# Altium PCB F407Z.PcbDoc (part 1 of 3)
Units mil, origin at the board's own origin, x right, y up, seen from the top; angles counter-clockwise.
Board outline 4724.41 x 3937.01 mil, 2 copper layers (Top Layer, Bottom Layer), stack 61.855 mil thick; 103 components, 137 nets, 547 pads, 2347 vias.
Unrouted connection lines stored in the file: 2.
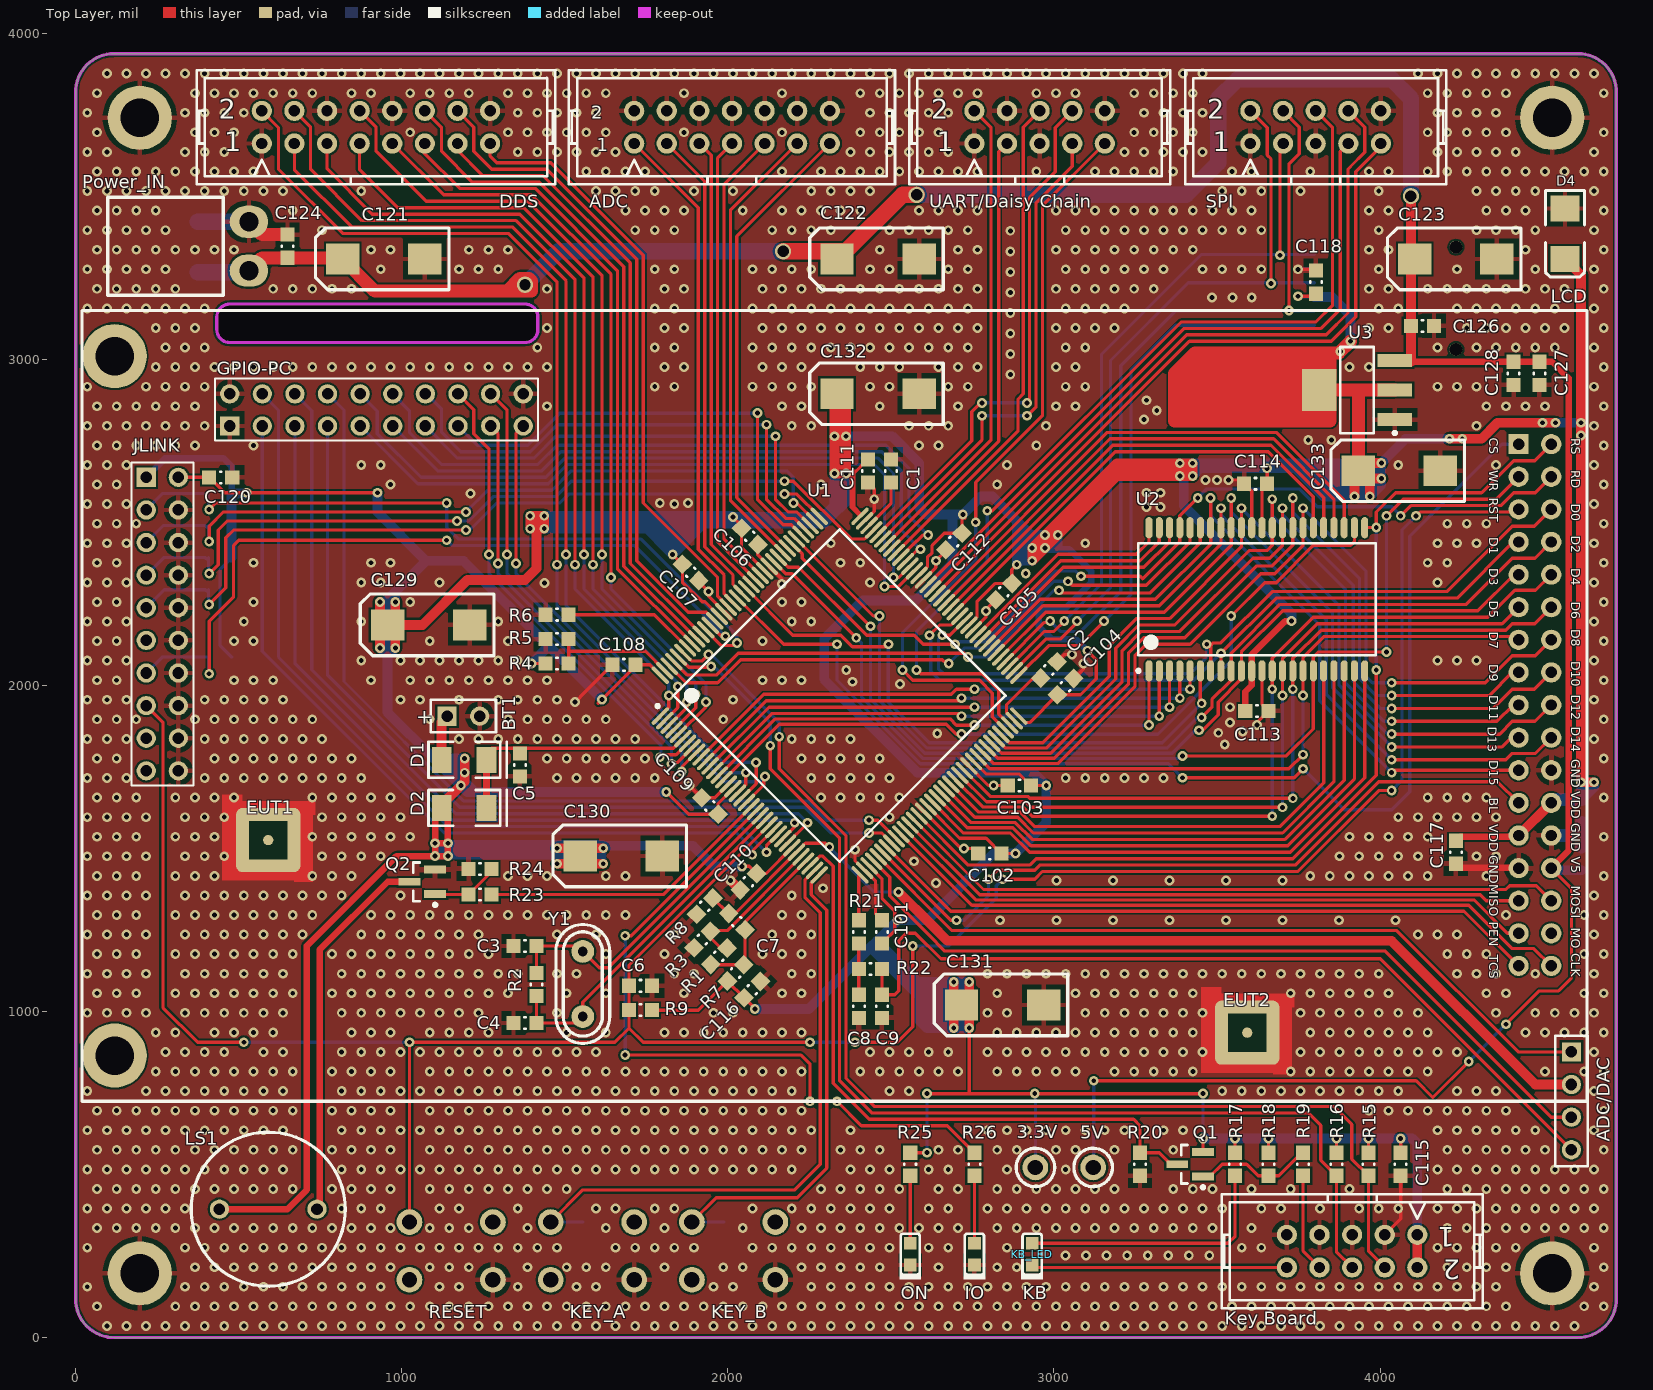
[diagram p0: Top Layer view]
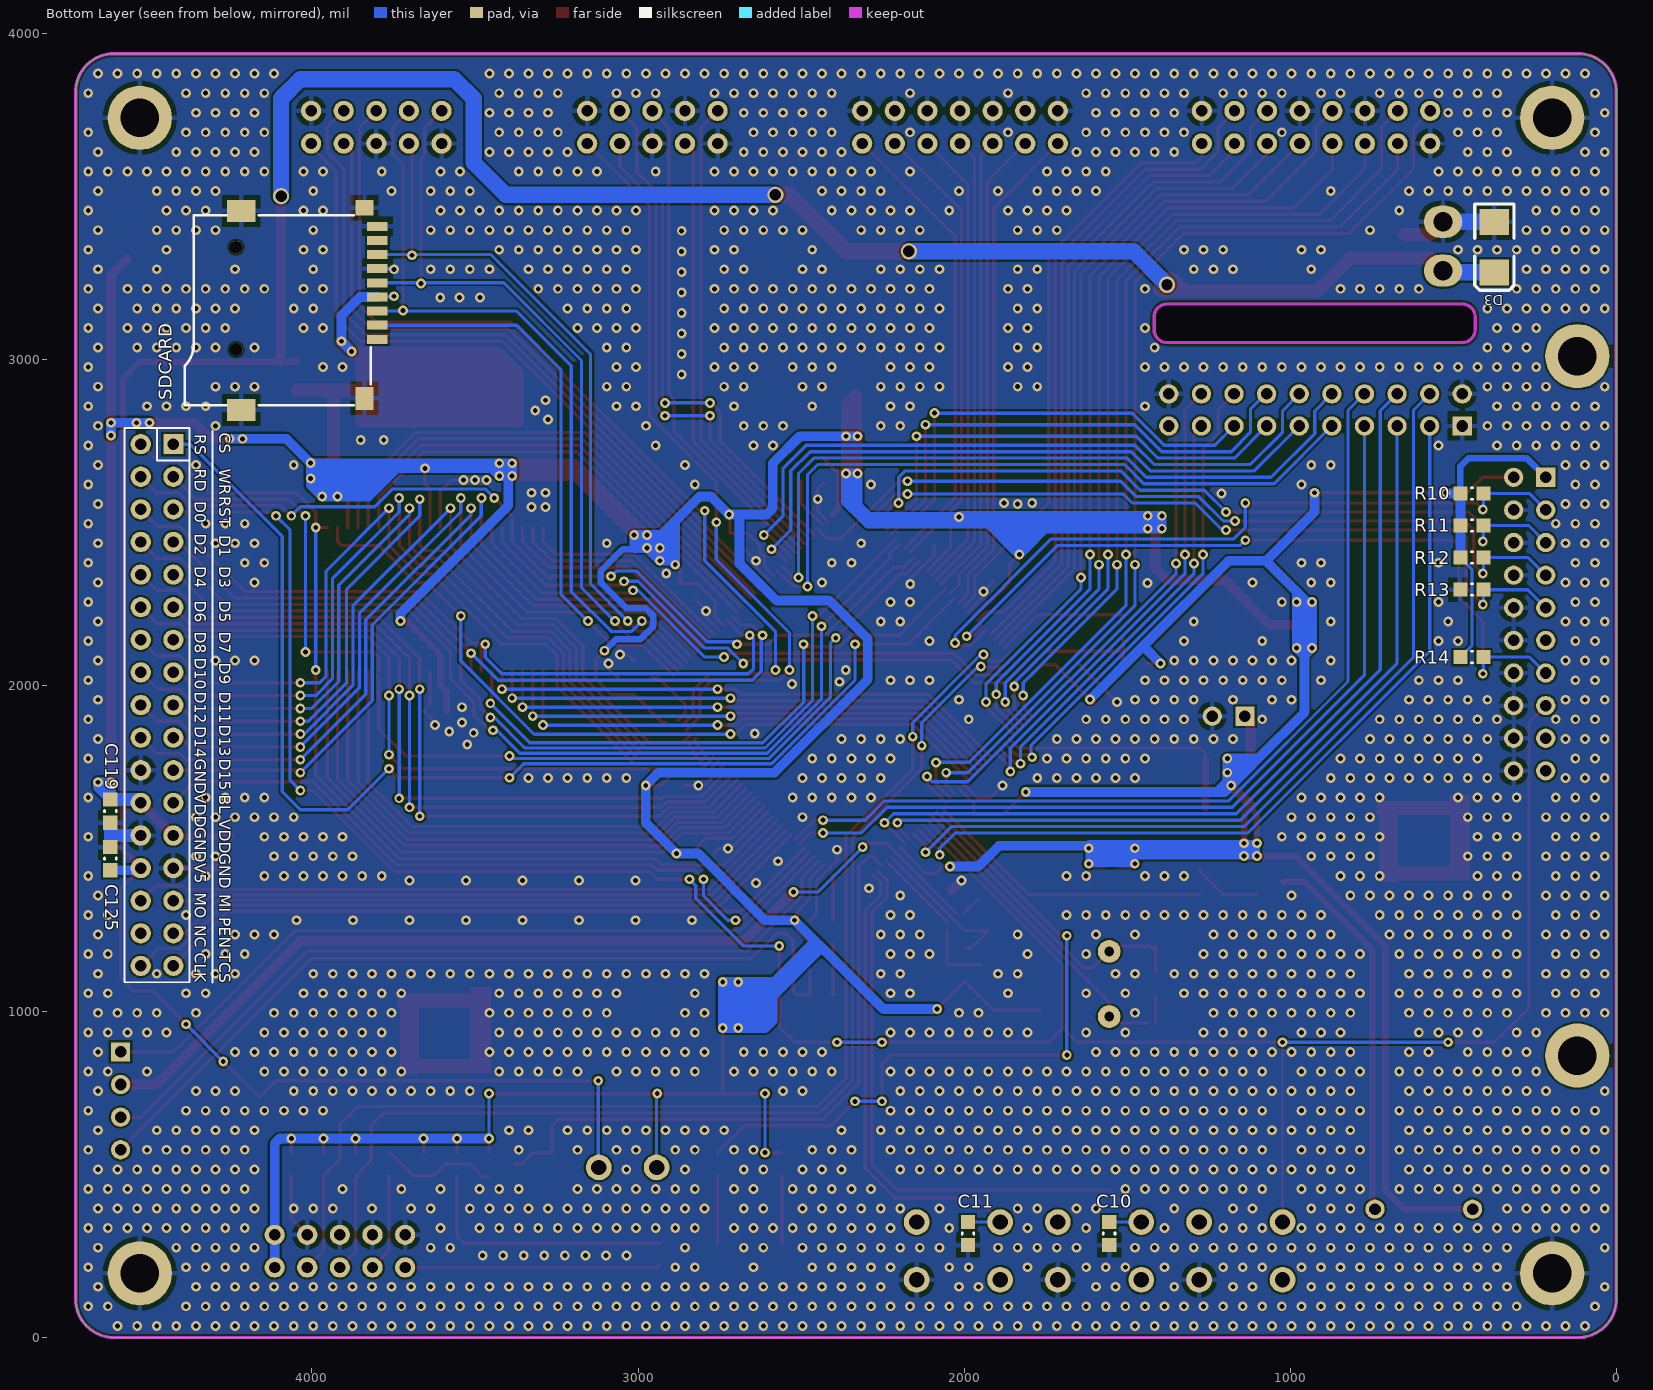
[diagram p1: Bottom Layer view, seen from below]

## Layer stack, top to bottom
Top Solder: solder mask 0.4, Solder Resist, Dk 3.5
Top Layer: signal copper 1.4
Dielectric 1: dielectric 59.0551, FR-4, Dk 4.8
Bottom Layer: signal copper 1.4
Bottom Solder: solder mask 0.4, Solder Resist, Dk 3.5

## Board outline
118.11,0 cw(c118.11,118.11) 0,118.11 0,3818.9 cw(c118.11,3818.9) 118.11,3937.01 4606.3,3937.01 cw(c4606.3,3818.9) 4724.41,3818.9 4724.41,118.11 cw(c4606.3,118.11) 4606.3,0
cut-out: 1377.95,3051.18 ccw(c1377.95,3090.55) 1417.32,3090.55 1417.32,3129.92 ccw(c1377.95,3129.92) 1377.95,3169.29 472.44,3169.29 ccw(c472.44,3129.92) 433.07,3129.92 433.07,3090.55 ccw(c472.44,3090.55) 472.44,3051.18

## Design rules (kind name [scope] priority, off if disabled: settings)
Clearance [All] p1: gap=6
HoleSize [All] p1: absolutevalues=TRUE maxlimit=99999 minlimit=12 maxpercent=80.000 minpercent=20.000
MinimumSolderMaskSliver [All] p1: minsoldermaskwidth=1
PolygonConnect PolygonConnect_1 [IsVia] p1: connectstyle=Direct reliefconductorwidth=10 reliefentries=4 polygonreliefangle="90 Angle" airgapwidth=10
PolygonConnect [All] p2: connectstyle=Relief reliefconductorwidth=15 reliefentries=4 polygonreliefangle="90 Angle" airgapwidth=15
RoutingVias [All] p1: holewidth=15 width=30 viastyle="Through Hole" minholewidth=12 minwidth=25 maxholewidth=1000 maxwidth=5000
SilkToSilkClearance [All] p1: silktosilkclearance=1
SilkToSolderMaskClearance [IsPad] p1: minsilkscreentomaskgap=1 clearancetoexposedcopper=TRUE
SolderMaskExpansion [All] p1: expansion=4
Width [All] p1: maxlimit=10000 minlimit=6 preferedwidth=10
26 further rules are at their usual default settings.

## Classes and differential pairs
component class Ports: 3.3V 5V ADC ADC1 ADC/DAC DDS DDS1 EUT1 EUT2 GPIO-PC JLINK JLINK1 KB KB_LED KB_LED1 "Key Board" "Key Board1" Q1 R10 R11 R12 R13 R14 R15 R16 R17 R18 R19 R20 SDCARD SDCARD1 SPI SPI1 "UART/Daisy Chain" "UART/Daisy Chain1"
component class STM32: BT1 C1 C2 C3 C4 C5 C6 C7 C8 C9 C10 C11 D1 D2 D3 D4 IO KEY_A KEY_B LCD LS1 ON Power_IN Q2 R1 R2 R3 R4 R5 R6 R7 R8 R9 R21 R22 R23 R24 R25 R26 RESET U1 U2 U3 Y1
component class "Decoupling CAP": C12 C13 C14 C15 C16 C17 C18 C19 C20 C21 C22 C23 C24 C25 C26 C27 C28 C29 C101 C102 C103 C104 C105 C106 C107 C108 C109 C110 C111 C112 C113 C114 C115 C116 C117 C118 C119 C120 C121 C122 C123 C124 C125 C126 C127 C128 C129 C130 C131 C132 C133

## Components (designator, comment, footprint, x,y, rotation, side; value= is the part's Value field where it differs from the comment)
3.3V "TestPoint" TestHole 2942.91,521.65 r90 top
5V "TestPoint" TestHole 3120.08,521.65 r0 top
ADC "Header 7X2" HEADER7X2 1712.6,3661.42 r0 top
ADC/DAC "Header 4" HDR1X4 4586.61,875.98 r270 top
BT1 "3V" BAT-2 1188.98,1905.51 r0 top
C1 "2.2uF" CAPC0603(1608)55_M 2500,2657.48 r270 top
C2 "2.2uF" CAPC0603(1608)55_M 2984.25,2047.24 r225 top
C3 "33pF" CAPC0603(1608)55_M 1377.95,1200.79 r180 top
C4 "33pF" CAPC0603(1608)55_M 1377.95,964.57 r180 top
C5 "100nF" CAPC0603(1608)55_M 1362.2,1755.91 r270 top
C6 "100nF" CAPC0603(1608)55_M 1732.28,1078.74 r0 top
C7 "100nF" CAPC0603(1608)55_M 2027.56,1275.59 r315 top
C8 "10nF" CAPC0603(1608)55_M 2401.57,1015.75 r90 top
C9 "10nF" CAPC0603(1608)55_M 2472.44,1015.75 r90 top
C10 "100nF" CAPC0603(1608)55_M 1555.12,318.9 r270 bottom
C11 "100nF" CAPC0603(1608)55_M 1988.19,318.9 r270 bottom
C101 "100nF" CAPC0603(1608)55_M 2472.44,1244.09 r270 top
C102 "100nF" CAPC0603(1608)55_M 2803.15,1484.25 r0 top
C103 "100nF" CAPC0603(1608)55_M 2893.7,1692.91 r0 top
C104 "100nF" CAPC0603(1608)55_M 3035.43,1996.06 r225 top
C105 "100nF" CAPC0603(1608)55_M 2846.46,2287.4 r45 top
C106 "100nF" CAPC0603(1608)55_M 2066.93,2456.69 r135 top
C107 "100nF" CAPC0603(1608)55_M 1885.83,2346.46 r135 top
C108 "100nF" CAPC0603(1608)55_M 1681.1,2062.99 r0 top
C109 "100nF" CAPC0603(1608)55_M 1944.88,1629.92 r315 top
C110 "100nF" CAPC0603(1608)55_M 2062.99,1397.64 r45 top
C111 "100nF" CAPC0603(1608)55_M 2429.13,2657.48 r90 top
C112 "100nF" CAPC0603(1608)55_M 2692.91,2440.94 r45 top
C113 "100nF" CAPC0603(1608)55_M 3622.05,1921.26 r180 top
C114 "100nF" CAPC0603(1608)55_M 3618.11,2618.11 r0 top
C115 "100nF" CAPC0603(1608)55_M 4062.99,531.5 r90 top
C116 "100nF" CAPC0603(1608)55_M 2074.8,1066.93 r225 top
C117 "100nF" CAPC0603(1608)55_M 4232.28,1488.19 r90 top
C118 "100nF" CAPC0603(1608)55_M 3803.15,3236.22 r270 top
C119 "100nF" CAPC0603(1608)55_M 4618.11,1614.17 r90 bottom
C120 "100nF" CAPC0603(1608)55_M 444.88,2637.8 r180 top
C121 "470uF" CAPC7343 944.88,3307.09 r0 top
C122 "470uF" CAPC7343 2460.63,3307.09 r0 top
C123 "470uF" CAPC7343 4232.28,3307.09 r0 top
C124 "100nF" CAPC0603(1608)55_M 649.61,3346.46 r270 top
C125 "100nF" CAPC0603(1608)55_M 4618.11,1468.5 r270 bottom
C126 "100nF" CAPC0603(1608)55_M 4129.92,3102.36 r180 top
C127 "100nF" CAPC0603(1608)55_M 4488.19,2956.69 r90 top
C128 "100nF" CAPC0603(1608)55_M 4409.45,2956.69 r90 top
C129 "470uF" CAPC7343 1082.68,2185.04 r0 top
C130 "470uF" CAPC7343 1673.23,1476.38 r0 top
C131 "470uF" CAPC7343 2842.52,1019.68 r0 top
C132 "470uF" CAPC7343 2460.63,2893.7 r0 top
C133 "470uF" CAPC7343 4059.06,2657.48 r0 top
D1 "1N4148" LL34 1259.84,1771.65 r270 top
D2 "1N4148" LL34 1259.84,1624.02 r270 top
D3 "P6KE6.8A" DO-214AC 374.02,3266.26 r90 bottom
D4 "M7" DO-214AC 4566.93,3307.09 r90 top
DDS "Header 8X2" HEADER8X2 570.87,3661.42 r0 top
EUT1 "EUT" EUT 590.55,1525.59 r0 top
EUT2 "EUT" EUT 3592.52,935.04 r0 top
GPIO-PC "Header 10X2" "HEADER 10X2" 472.44,2795.28 r90 top
IO "LED-BLUE" 0603LED_BLUE_V 2755.91,255.91 r90 top
JLINK "Header 10X2" "HEADER 10X2" 216.54,2637.8 r0 top
KB_LED "LED-BLUE" 0603LED_BLUE_V 2933.07,255.91 r90 top
"Key Board" "JTAG" HEADER5X2 4114.17,314.96 r180 top
KEY_A "Button" Button665 1712.6,354.33 r180 top
KEY_B "Button" Button665 2145.67,354.33 r180 top
LCD "TFT_LCD4.7" DB2*17-3.5 19.69,3149.61 r270 top locked
LS1 "Speaker" Buzzer 590.55,393.7 r0 top
ON "LED-BLUE" 0603LED_BLUE_V 2559.06,255.91 r90 top
Power_IN "Header 2" VH3.96-2-AW 531.5,3346.46 r90 top
Q1 "MMBT3906" SOT23_M 3417.32,531.5 r180 top
Q2 "MMBT3904" SOT23_M 1062.99,1397.64 r180 top
R1 "0R" RESC0603(1608)_M 1972.44,1169.29 r225 top
R2 "1M" RESC0603(1608)_M 1413.39,1082.68 r90 top
R3 "Open" RESC0603(1608)_M 1921.26,1220.47 r45 top
R4 "20K" RESC0603(1608)_M 1476.38,2066.93 r0 top
R5 "20K" RESC0603(1608)_M 1476.38,2141.73 r0 top
R6 "100K" RESC0603(1608)_M 1476.38,2216.54 r180 top
R7 "49R9" RESC0603(1608)_M 2023.62,1118.11 r225 top
R8 "0R" RESC0603(1608)_M 1929.13,1322.83 r225 top
R9 "10K" RESC0603(1608)_M 1732.28,1003.94 r0 top
R10 "1K" RESC0603(1608)_M 442.91,2588.58 r180 bottom
R11 "1K" RESC0603(1608)_M 442.91,2490.16 r180 bottom
R12 "1K" RESC0603(1608)_M 442.91,2391.73 r180 bottom
R13 "1K" RESC0603(1608)_M 442.91,2293.31 r180 bottom
R14 "1K" RESC0603(1608)_M 442.91,2086.61 r180 bottom
R15 "10K" RESC0603(1608)_M 3964.57,531.5 r90 top
R16 "10K" RESC0603(1608)_M 3866.14,531.5 r90 top
R17 "1K" RESC0603(1608)_M 3555.12,531.5 r90 top
R18 "10K" RESC0603(1608)_M 3657.48,531.5 r90 top
R19 "1K" RESC0603(1608)_M 3763.78,531.5 r270 top
R20 "10K" RESC0603(1608)_M 3263.78,531.5 r90 top
R21 "1K" RESC0603(1608)_M 2401.57,1244.09 r270 top
R22 "1K" RESC0603(1608)_M 2437.01,1129.92 r0 top
R23 "1K" RESC0603(1608)_M 1240.16,1358.27 r180 top
R24 "10K" RESC0603(1608)_M 1240.16,1437.01 r0 top
R25 "1K" RESC0603(1608)_M 2559.06,531.5 r90 top
R26 "1K" RESC0603(1608)_M 2755.91,531.5 r90 top
RESET "Button" Button665 1279.53,354.33 r180 top
SDCARD "Trans Flash Card Socket" "TF Card" 4232.28,3149.61 r0 bottom
SPI "Header 5X2" HEADER5X2 3602.36,3661.42 r0 top
U1 "STM32F407ZxT6" LQFP144 2342.52,1968.5 r45 top locked
U2 "IS62WV51216BLL" TSOP-2-44 3622.05,2263.78 r90 top locked
U3 "AMS1117" SOT-223_M 3929.13,2905.51 r180 top
"UART/Daisy Chain" "Header 5X2" HEADER5X2 2755.91,3661.42 r0 top
Y1 "8MHz" HC-49S 1555.12,984.25 r90 top

## Footprints (in the part's own frame and the unit in brackets; to place one, negate y for a bottom-side part, rotate by r counter-clockwise, add the part's x,y. Pads: shape width x height; smd on the part's side, far side on the other; paste and mask are expansions set on the pad)
0603LED_BLUE_V [mm] "SMT LED, 2-Leads, Body 1.6x0.8mm (0603-Size)"
  rect 1x1 smd paste+0 mask+0: 1(0.85,0) 2(-0.85,0)
  silkscreen extent -1.97,-0.85 1.6,0.85, body extent -0.92,-0.53 1.09,0.53, height 1.1
BAT-2 [mm] "Battery; 2 Leads"
  rect 1.5x1.5 hole 0.9: 1(-1.27,0)
  round 1.5 hole 0.9: 2(1.27,0)
  silkscreen extent -2.54,-1.27 2.54,1.27
Button665 [mm]
  round 2 hole 1.2: 0(0,0) 1(6.5,0) 2(0,4.5) 3(6.5,4.5)
  body extent -0.25,-0.75 6.75,5.25, height 5
Buzzer [mm]
  round 1.5 hole 0.9: 1(-3.8,0) 2(3.8,0)
  silkscreen extent -6,-6 6,6, body extent -6.01,-6.01 6.01,6.01, height 9.6
CAPC0603(1608)55_M [mm] "Chip Capacitor, Body 1.6x0.8mm, Height 0.55mm, IPC Low Density"
  rect 1.1x1.1 smd: 1(-0.9,0) 2(0.9,0)
  silkscreen extent -0.05,-0.45 0.05,0.45, body extent -0.87,-0.47 0.88,0.48, height 0.55
CAPC7343 [mm] "SMT Capacitor, 2 Leads, Body 7.3x4.3mm"
  rect 2.6x2.4 smd: 1(-3.202,0.007) 2(3.198,0.007)
  silkscreen extent -5.33,-2.39 5.08,2.41, body extent -3.49,-2.03 3.51,2.04, height 2.91
DB2*17-3.5 [mil]
  round 196.85 hole 118.11: 0(140.16,100) 0(2284.84,100)
  rect 62x62 hole 35: 1(410,4405)
  round 62 hole 35: 2(410,4505) 3(510,4405) 4(510,4505) 5(610,4405) 6(610,4505) 7(710,4405) 8(710,4505) 9(810,4405) 10(810,4505) 11(910,4405) 12(910,4505) 13(1010,4405) 14(1010,4505) 15(1110,4405) 16(1110,4505) 17(1210,4405) 18(1210,4505) 19(1310,4405) 20(1310,4505) 21(1410,4405) 22(1410,4505) 23(1510,4405) 24(1510,4505) 25(1610,4405) 26(1610,4505) 27(1710,4405) 28(1710,4505) 29(1810,4405) 30(1810,4505) 31(1910,4405) 32(1910,4505) 33(2010,4405) 34(2010,4505)
  silkscreen extent 0,0 2425,4615, body extent -5,-5 2430,4620, height 472
DO-214AC [mil]
  rect 80x90 smd: 1(155,0) 2(0,0)
  silkscreen extent -55,-60 210,60
EUT [mm]
  round 0.8 smd: 1(0,0)
  oval 1x5 smd: 2(-2,0) 2(2,0)
  oval 5x1 smd: 2(0,-2) 2(0,2)
HC-49S [mil]
  round 70 hole 30: 1(0,0) 2(200,0)
  silkscreen extent -82,-82 282,82, body extent -83,-83 283,83, height 118
HDR1X4 [mm] "Connector; Header; 4 Position"
  rect 1.5x1.5 hole 0.9: 1(0,0)
  round 1.5 hole 0.9: 2(2.54,0) 3(5.08,0) 4(7.62,0)
  silkscreen extent -1.27,-1.27 8.89,1.27
HEADER5X2 [mil]
  round 62 hole 35: 1(0,0) 2(0,100) 3(100,0) 4(100,100) 5(200,0) 6(200,100) 7(300,0) 8(300,100) 9(400,0) 10(400,100)
  silkscreen extent -200,-125 600,225
HEADER7X2 [mil]
  round 62 hole 35: 1(0,0) 2(0,100) 3(100,0) 4(100,100) 5(200,0) 6(200,100) 7(300,0) 8(300,100) 9(400,0) 10(400,100) 11(500,0) 12(500,100) 13(600,0) 14(600,100)
  silkscreen extent -200,-125 800,225
HEADER8X2 [mil]
  round 62 hole 35: 1(0,0) 2(0,100) 3(100,0) 4(100,100) 5(200,0) 6(200,100) 7(300,0) 8(300,100) 9(400,0) 10(400,100) 11(500,0) 12(500,100) 13(600,0) 14(600,100) 15(700,0) 16(700,100)
  silkscreen extent -200,-125 902,225
"HEADER 10X2" [mm]
  rect 1.5x1.5 hole 0.9: 1(0,0)
  round 1.5 hole 0.9: 2(2.5,0) 3(0,-2.54) 4(2.5,-2.54) 5(0,-5.08) 6(2.5,-5.08) 7(0,-7.62) 8(2.5,-7.62) 9(0,-10.16) 10(2.5,-10.16) 11(0,-12.7) 12(2.5,-12.7) 13(0,-15.24) 14(2.5,-15.24) 15(0,-17.78) 16(2.5,-17.78) 17(0,-20.32) 18(2.5,-20.32) 19(0,-22.86) 20(2.5,-22.86)
  silkscreen extent -1.14,-24 3.68,1.14, body extent -1.14,-24 3.68,1.14, height 8
LL34 [mil]
  rect 80x60 smd: 1(0,-137.8) 2(0,0)
  silkscreen extent -55,-178 55,62
LQFP144 [mm] "Thin QFP, 144-Leads, Body 20x20mm, Pitch 0.5mm, IPC Low Density"
  oval 1.8x0.3 smd: 1(-11,8.75) 2(-11,8.25) 3(-11,7.75) 4(-11,7.25) 5(-11,6.75) 6(-11,6.25) 7(-11,5.75) 8(-11,5.25) 9(-11,4.75) 10(-11,4.25) 11(-11,3.75) 12(-11,3.25) 13(-11,2.75) 14(-11,2.25) 15(-11,1.75) 16(-11,1.25) 17(-11,0.75) 18(-11,0.25) 19(-11,-0.25) 20(-11,-0.75) 21(-11,-1.25) 22(-11,-1.75) 23(-11,-2.25) 24(-11,-2.75) 25(-11,-3.25) 26(-11,-3.75) 27(-11,-4.25) 28(-11,-4.75) 29(-11,-5.25) 30(-11,-5.75) 31(-11,-6.25) 32(-11,-6.75) 33(-11,-7.25) 34(-11,-7.75) 35(-11,-8.25) 36(-11,-8.75) 73(11,-8.75) 74(11,-8.25) 75(11,-7.75) 76(11,-7.25) 77(11,-6.75) 78(11,-6.25) 79(11,-5.75) 80(11,-5.25) 81(11,-4.75) 82(11,-4.25) 83(11,-3.75) 84(11,-3.25) 85(11,-2.75) 86(11,-2.25) 87(11,-1.75) 88(11,-1.25) 89(11,-0.75) 90(11,-0.25) 91(11,0.25) 92(11,0.75) 93(11,1.25) 94(11,1.75) 95(11,2.25) 96(11,2.75) 97(11,3.25) 98(11,3.75) 99(11,4.25) 100(11,4.75) 101(11,5.25) 102(11,5.75) 103(11,6.25) 104(11,6.75) 105(11,7.25) 106(11,7.75) 107(11,8.25) 108(11,8.75)
  oval 0.3x1.8 smd: 37(-8.75,-11) 38(-8.25,-11) 39(-7.75,-11) 40(-7.25,-11) 41(-6.75,-11) 42(-6.25,-11) 43(-5.75,-11) 44(-5.25,-11) 45(-4.75,-11) 46(-4.25,-11) 47(-3.75,-11) 48(-3.25,-11) 49(-2.75,-11) 50(-2.25,-11) 51(-1.75,-11) 52(-1.25,-11) 53(-0.75,-11) 54(-0.25,-11) 55(0.25,-11) 56(0.75,-11) 57(1.25,-11) 58(1.75,-11) 59(2.25,-11) 60(2.75,-11) 61(3.25,-11) 62(3.75,-11) 63(4.25,-11) 64(4.75,-11) 65(5.25,-11) 66(5.75,-11) 67(6.25,-11) 68(6.75,-11) 69(7.25,-11) 70(7.75,-11) 71(8.25,-11) 72(8.75,-11) 109(8.75,11) 110(8.25,11) 111(7.75,11) 112(7.25,11) 113(6.75,11) 114(6.25,11) 115(5.75,11) 116(5.25,11) 117(4.75,11) 118(4.25,11) 119(3.75,11) 120(3.25,11) 121(2.75,11) 122(2.25,11) 123(1.75,11) 124(1.25,11) 125(0.75,11) 126(0.25,11) 127(-0.25,11) 128(-0.75,11) 129(-1.25,11) 130(-1.75,11) 131(-2.25,11) 132(-2.75,11) 133(-3.25,11) 134(-3.75,11) 135(-4.25,11) 136(-4.75,11) 137(-5.25,11) 138(-5.75,11) 139(-6.25,11) 140(-6.75,11) 141(-7.25,11) 142(-7.75,11) 143(-8.25,11) 144(-8.75,11)
  silkscreen extent -10.72,-9.15 9.15,9.57, body extent -10,-10 10,10, height 1.6
RESC0603(1608)_M [mm] "Chip Resistor, Body 1.6x0.8mm, IPC Low Density"
  rect 1.1x1.1 smd: 1(-0.9,0) 2(0.9,0)
  silkscreen extent -0.05,-0.45 0.05,0.45, body extent -0.85,-0.47 0.85,0.47, height 0.6
SOT23_M [mm] "SOT23, 3-Leads, Body 3x1.4mm, Pitch 0.95mm, IPC Low Density"
  rect 1.7x0.6 smd: 1(-1,0.95) 2(-1,-0.95) 3(1,0)
  silkscreen extent -1.13,-1.5 0.7,1.92, body extent -0.7,-1.5 0.7,1.5, height 1.1
SOT-223_M [mm] "SOT223, 4-Leads, Body 6.5x3.5mm, Pitch 2.3mm, Lead Span 7mm, IPC Low Density"
  rect 2.7x1 smd: 1(-2.95,2.3) 2(-2.95,0) 3(-2.95,-2.3)
  rect 2.7x3.3 smd: 2(2.95,0)
  silkscreen extent -3.08,-3.35 1.3,3.47, body extent -1.85,-3.35 1.85,3.35, height 1.8
TestHole [mm]
  round 2 hole 1.2: 1(0,0)
  silkscreen extent -1.5,-1.5 1.5,1.5
"TF Card" [mm] "TF卡"
  round 1 hole 1: 0(0,3.05) 1(0,-4.925)
  rect 1.6x0.7 smd: 1(-11.008,2.25) 2(-11.008,1.15) 3(-11.008,0.05) 4(-11.008,-1.05) 5(-11.008,-2.15) 6(-11.008,-3.25) 7(-11.008,-4.35) 8(-11.008,-5.45) 9(-11.008,-6.55)
  rect 1.4x1.2 smd: 10(-10,-8.004)
  rect 2.2x1.7 smd: 11(-0.4,-7.75) 13(-0.4,7.75)
  rect 1.4x1.8 smd: 12(-10,6.85)
  silkscreen extent -10.5,-7.4 4,7.4, body extent -10.6,-7.5 4.1,7.5, height 1.5
TSOP-2-44 [mm] "SOP, 44-Leads, Body 18.5x10.3mm, Pitch 0.8mm, IPC Medium Density"
  oval 1.65x0.55 smd: 1(-5.575,8.4) 2(-5.575,7.6) 3(-5.575,6.8) 4(-5.575,6) 5(-5.575,5.2) 6(-5.575,4.4) 7(-5.575,3.6) 8(-5.575,2.8) 9(-5.575,2) 10(-5.575,1.2) 11(-5.575,0.4) 12(-5.575,-0.4) 13(-5.575,-1.2) 14(-5.575,-2) 15(-5.575,-2.8) 16(-5.575,-3.6) 17(-5.575,-4.4) 18(-5.575,-5.2) 19(-5.575,-6) 20(-5.575,-6.8) 21(-5.575,-7.6) 22(-5.575,-8.4) 23(5.575,-8.4) 24(5.575,-7.6) 25(5.575,-6.8) 26(5.575,-6) 27(5.575,-5.2) 28(5.575,-4.4) 29(5.575,-3.6) 30(5.575,-2.8) 31(5.575,-2) 32(5.575,-1.2) 33(5.575,-0.4) 34(5.575,0.4) 35(5.575,1.2) 36(5.575,2) 37(5.575,2.8) 38(5.575,3.6) 39(5.575,4.4) 40(5.575,5.2) 41(5.575,6) 42(5.575,6.8) 43(5.575,7.6) 44(5.575,8.4)
  silkscreen extent -5.7,-9.25 4.35,9.35, body extent -5.15,-9.25 5.15,9.25, height 1.2
VH3.96-2-AW [mm]
  oval 2.5x3 hole 1.5: 1(-1.905,0) 2(1.905,0)
  silkscreen extent -3.81,2 3.81,11, body extent -3.8,-0.4 3.8,11, height 9

## Part data
ADC: "Header, 7-Pin, Dual row"
ADC/DAC: "Header, 4-Pin"
BT1: library part Battery, "Multicell Battery"
C1 C2 C3 C4 C5 C6 C7 C8 C9 C10 C11 C101 C102 C103 C104 C105 C106 C107 C108 C109 C110 C111 C112 C113 C114 C115 C116 C117 C118 C119 C120 C124 C125 C126 C127 C128: library part CAP
C121 C122 C123 C129 C130 C131 C132 C133: library part CAP-Pol
D1 D2 D3 D4: library part Diode
DDS: "Header, 8-Pin, Dual row"
GPIO-PC JLINK: "Header, 10-Pin, Dual row"
"Key Board": library part "Header 5X2", "Header, 5-Pin, Dual row"
LS1: "Loudspeaker"
Power_IN: "Header, 2-Pin"
Q1: "PNP General Purpose Amplifier"
Q2: "NPN General Purpose Amplifier"
R1 R2 R3 R4 R5 R6 R7 R8 R9 R10 R11 R12 R13 R14 R15 R16 R17 R18 R19 R20 R21 R22 R23 R24 R25 R26: library part RES
SDCARD: library part "Trans Flash Card"
SPI "UART/Daisy Chain": "Header, 5-Pin, Dual row"
Y1: library part XTAL, "Crystal Oscillator"

## Free pads (board coordinates)
  round 196.85 hole 118.11: 0(196.85,196.85) 1(4527.56,196.85) 2(4527.56,3740.16) 3(196.85,3740.16)
  round 50 hole 35: 16(1377.95,3228.35) 17(2169.29,3330.71) 18(2578.74,3503.94) 19(4094.49,3500)

## Via types
v1: diameter 30, hole 15, Top Layer to Bottom Layer, tented both sides, 2344 vias
v2: diameter 30, hole 15, Top Layer to Bottom Layer, 3 vias

## Nets (pads, with @x,y where several pads share a name; then routed paths per layer and width w, separated by ;. In a path a pad name is that pad's centre, name@x,y a point inside that pad or via, vN(x,y) a via of type N, cw(c..) or ccw(c..) an arc to the next point about the centre after c; other vN are vias at no path point)
+5V: 5V.1 C121.1 C122.1 C123.1 C124.2 C125.2 C126.2 C127.2 C128.2 D3.2 LCD.28 pad.16 pad.17 pad.18 pad.19 Power_IN.1 U3.3 | length 9770.5
  Top Layer w10: v1(3122.05,787.4) 4110.24,787.4 4161.42,736.22 v1(4271.65,846.46) ; v1(4385.83,960.63) 4488.19,1062.99 4547.24,1062.99 4586.61,1102.36 4586.61,1377.68 LCD.28@4524.69,1439.61
  Top Layer w20: U3.3@4045.28,2996.06 4049.21,2992.13 4094.49,2992.13 4527.56,2992.13 4578.74,2940.94 4578.74,1493.66 LCD.28@4524.69,1439.61
  Top Layer w30: U3.3@4094.49,2992.13 pad.19@4094.49,3500 C123.1@4094.49,3307.09
  Top Layer w40: Power_IN.1@531.5,3271.46 571.06,3311.02 C124.2@649.61,3311.02 815.16,3311.02 C121.1@818.82,3307.36 917.52,3208.66 1322.83,3208.66 ; 1322.83,3208.66 1397.64,3208.66 1397.64,3240.16 1389.76,3248.03 1362.2,3248.03 1322.83,3208.66
  Top Layer w50: pad.17@2169.29,3330.71 2361.83,3330.71 2535.83,3504.02 pad.18@2578.74,3503.94
  Bottom Layer w10: 5V.1@3120.08,521.65 3122.05,523.62 v1(3122.05,787.4) ; v1(4271.65,846.46) v1(4385.83,960.63)
  Bottom Layer w30: LCD.28@4524.69,1439.61 4531.22,1433.07 C125.2@4618.11,1433.07
  Bottom Layer w50: D3.2@374.02,3266.26 526.3,3266.26 Power_IN.1@531.5,3271.46 ; pad.16@1377.95,3228.35 1480.32,3330.71 pad.17@2169.29,3330.71 ; pad.18@2578.74,3503.94 3405.51,3503.94 3503.94,3602.36 3503.94,3799.21 3562.99,3858.27 4035.43,3858.27 4094.49,3799.21 pad.19@4094.49,3500
ADC: ADC/DAC.1 U1.41 | length 2363.8
  Top Layer w10: U1.41@2460.83,1474.36 2687.17,1248.03 4051.18,1248.03 4423.23,875.98 ADC/DAC.1@4576.77,875.98
BOOT0: R6.1 U1.138 | length 406.6
  Top Layer w10: R6.1@1511.81,2216.54 1774.34,2216.54 U1.138@1876.22,2114.66
DAC: ADC/DAC.3 U1.40 | length 2488.2
  Top Layer w10: U1.40@2446.92,1460.44 2496.06,1411.3 2496.06,1354.33 2614.17,1236.22 2665.35,1185.04 4015.75,1185.04 4524.8,675.98 ADC/DAC.3@4576.77,675.98
DC_CLK: "UART/Daisy Chain.6" U1.100 | length 1536.5
  Top Layer w10: U1.100@2516.51,2406.97 2889.76,2780.22 2889.76,2877.95 2905.51,2893.7 2905.51,3711.02 2955.91,3761.42
DC_DATA: "UART/Daisy Chain.7" U1.103 | length 1539.7
  Top Layer w10: U1.103@2474.75,2448.72 2779.53,2753.5 ; 2779.52,2753.5 v1(2779.52,2826.77) ; v1(2917.32,2826.77) 2944.88,2854.33 2944.88,3480.32 3055.91,3591.34 3055.91,3661.42
  Bottom Layer w10: v1(2779.52,2826.77) v1@2779.52,2830.69 ; v1@2779.53,2830.7 2783.46,2826.77 v1(2917.32,2826.77)
DC_DIR: "UART/Daisy Chain.9" U1.69 | length 2304.8
  Top Layer w10: v1(2535.43,2047.24) 2567.18,2015.5 2771.91,2015.5 2811.02,1976.38 2811.02,1903.66 U1.69@2850.58,1864.11 ; v1(2759.84,2500) 2759.84,2622.05 2964.57,2826.77 2964.57,3470.08 3155.91,3661.42
  Bottom Layer w10: v1(2535.43,2047.24) 2535.43,2161.42 2759.84,2385.83 v1(2759.84,2500)
DC_LATCH: "UART/Daisy Chain.8" U1.104 | length 1644
  Top Layer w10: U1.104@2460.83,2462.64 2748.03,2749.84 2748.03,2838.58 2775.59,2866.14 v1(2779.53,2866.14) ; 3055.91,3761.42 3003.94,3709.45 3003.94,3574.8 2925.2,3496.06 2925.2,2874.02 v1(2917.32,2866.14) ; v1(2917.32,2866.14) 2917.32,2858.27 v1(2917.32,2866.14)
  Bottom Layer w10: v1(2779.53,2866.14) v1(2917.32,2866.14)
DDS_CS: DDS.8 U1.4 | length 2534.2
  Top Layer w10: DDS.8@870.87,3761.42 921.26,3711.02 921.26,3637.8 1074.8,3484.25 1385.83,3484.25 1614.17,3255.91 v1(1614.17,2401.57) ; U1.4@1834.46,1864.11 1901.57,1931.22 v1(1901.57,1972.44)
  Bottom Layer w10: v1(1614.17,2401.57) 1614.17,2295.28 1901.57,2007.87 v1(1901.57,1972.44)
DDS_P0: DDS.2 U1.18 | length 3054.4
  Top Layer w10: DDS.2@570.87,3761.42 622.05,3710.24 622.05,3582.68 818.9,3385.83 1326.77,3385.83 1476.38,3236.22 v1(1476.38,2370.08) ; U1.18@2029.33,1669.24 2055.12,1695.02 v1(2055.12,1732.28)
  Bottom Layer w10: v1(1476.38,2370.08) 1476.38,2244.09 1988.19,1732.28 v1(2055.12,1732.28)
DDS_P1: DDS.3 U1.19 | length 2960.4
  Top Layer w10: DDS.3@670.87,3661.42 670.87,3581.1 846.46,3405.51 1338.58,3405.51 1503.94,3240.16 v1(1503.94,2401.57) ; U1.19@2043.25,1655.32 2086.61,1698.68 v1(2086.61,1763.78)
  Bottom Layer w10: v1@1500,2401.57 1503.94,2397.64 1503.94,2244.09 1984.25,1763.78 v1(2086.61,1763.78)
DDS_P2: DDS.4 U1.1 | length 2619.1
  Top Layer w10: DDS.4@670.87,3761.42 720.47,3711.81 720.47,3582.68 877.95,3425.2 1350.39,3425.2 1531.5,3244.09 v1(1531.5,2370.08) ; U1.1@1792.7,1905.87 1811.53,1924.69 1811.02,1925.2 1818.9,1933.07 v1(1818.9,1968.5)
  Bottom Layer w10: v1(1531.5,2370.08) 1531.5,2295.28 1818.9,2007.87 v1(1818.9,1968.5)
DDS_P3: DDS.5 U1.2 | length 2496.7
  Top Layer w10: DDS.5@770.87,3661.42 770.87,3583.46 909.45,3444.88 1362.2,3444.88 1559.06,3248.03 v1(1559.06,2401.57) ; U1.2@1806.62,1891.95 1846.46,1931.78 v1(1846.46,1996.06)
  Bottom Layer w10: v1(1559.06,2401.57) 1559.06,2295.28 1846.46,2007.87 v1(1846.46,1996.06)
DDS_RESET: DDS.15 U1.129 | length 1821
  Top Layer w10: DDS.15@1270.87,3661.42 1270.87,3622.83 1291.34,3602.36 1456.69,3602.36 1740.16,3318.9 1740.16,2559.06 1968.5,2330.71 1968.5,2272.92 U1.129@2001.49,2239.93
DDS_SCLK: DDS.9 U1.5 | length 2402.6
  Top Layer w10: DDS.9@970.87,3661.42 1128.35,3503.94 1397.64,3503.94 1641.73,3259.84 v1(1641.73,2330.71) ; U1.5@1848.38,1850.19 1933.07,1934.88 v1(1933.07,1948.82)
  Bottom Layer w10: v1(1641.73,2330.71) 1641.73,2295.28 1933.07,2003.94 v1(1933.07,1948.82)
DDS_SDIO0: DDS.12 U1.136 | length 2084
  Top Layer w10: DDS.12@1070.87,3761.42 1122.05,3710.24 1122.05,3637.8 1216.54,3543.31 1421.26,3543.31 1681.1,3283.46 1681.1,2365.45 U1.136@1904.06,2142.5
DDS_SDIO1: DDS.11 U1.137 | length 2008.3
  Top Layer w10: DDS.11@1070.87,3661.42 1070.87,3629.92 1177.17,3523.62 1409.45,3523.62 1661.42,3271.65 1661.42,2357.3 U1.137@1890.14,2128.58
DDS_SDIO2: DDS.14 U1.132 | length 2021.7
  Top Layer w10: DDS.14@1170.87,3761.42 1220.47,3711.81 1220.47,3637.8 1275.59,3582.68 1444.88,3582.68 1720.47,3307.09 1720.47,2381.89 1877.95,2224.41 1933.5,2224.41 U1.132@1959.74,2198.17
DDS_SDIO3: DDS.13 U1.135 | length 1922.9
  Top Layer w10: DDS.13@1170.87,3661.42 1170.87,3640.16 1248.03,3562.99 1433.07,3562.99 1700.79,3295.28 1700.79,2373.61 U1.135@1917.98,2156.42
DDS_UP: DDS.7 U1.3 | length 2447.7
  Top Layer w10: DDS.7@870.87,3661.42 870.08,3660.63 870.08,3582.68 988.19,3464.57 1374.02,3464.57 1586.61,3251.97 v1(1586.61,2370.08) ; U1.3@1820.54,1878.03 1820.54,1878.26 1874.02,1931.73 v1(1874.02,1948.82)
  Bottom Layer w10: v1(1586.61,2370.08) 1586.61,2295.28 1874.02,2007.87 v1(1874.02,1948.82)
DOUT1: ADC.9 U1.122 | length 1421.5
  Top Layer w10: U1.122@2098.93,2337.37 1988.19,2448.11 1988.19,3537.01 ADC.9@2112.6,3661.42
DOUT2: ADC.7 U1.123 | length 1404.5
  Top Layer w10: ADC.7@2012.6,3661.42 1968.5,3617.32 1968.5,2439.96 U1.123@2085.01,2323.45
DOUT3: ADC.5 U1.124 | length 1417.5
  Top Layer w10: ADC.5@1912.6,3661.42 1948.82,3625.2 1948.82,2431.8 U1.124@2071.09,2309.53
DOUT4: ADC.3 U1.126 | length 1475.3
  Top Layer w10: ADC.3@1812.6,3661.42 1929.13,3544.88 1929.13,2425.2 2015.75,2338.58 2015.75,2309.2 U1.126@2043.25,2281.69
DRDY: ADC.13 U1.116 | length 1422.8
  Top Layer w10: U1.116@2182.45,2420.89 2027.56,2575.77 2027.56,3376.38 ADC.13@2312.6,3661.42
FSMC_A0: U1.10 U2.5 | length 1641.4
  Top Layer w10: U1.10@1917.98,1780.59 2109.83,1972.44 2685.04,1972.44 2700.79,1988.19 v1(2755.91,1988.19) ; v1(3417.32,1988.19) U2.5@3417.32,2044.29
  Bottom Layer w10: v1(2755.91,1988.19) v1(3417.32,1988.19)
FSMC_A1: U1.11 U2.4 | length 1617.9
  Top Layer w10: U1.11@1931.9,1766.67 2117.98,1952.76 2708.66,1952.76 v1(2716.54,1960.63) ; v1(3385.83,1960.63) U2.4@3385.83,2044.29
  Bottom Layer w10: v1(2716.54,1960.63) v1(3385.83,1960.63)
FSMC_A2: U1.12 U2.3 | length 1594.4
  Top Layer w10: U1.12@1945.82,1752.75 2126.13,1933.07 v1(2755.91,1933.07) ; v1(3354.33,1933.07) U2.3@3354.33,2044.29
  Bottom Layer w10: v1(2755.91,1933.07) v1(3354.33,1933.07)
FSMC_A3: U1.13 U2.2 | length 1577.4
  Top Layer w10: U1.13@1959.74,1738.83 2134.29,1913.39 2708.66,1913.39 v1(2716.54,1905.51) ; v1(3322.83,1905.51) U2.2@3322.83,2044.29
  Bottom Layer w10: v1(2716.54,1905.51) v1(3322.83,1905.51)
FSMC_A4: U1.14 U2.1 | length 1563.2
  Top Layer w10: U1.14@1973.65,1724.91 2145.74,1897 2681.74,1897 2700.79,1877.95 v1(2755.91,1877.95) ; v1(3291.34,1877.95) U2.1@3291.34,2044.29
  Bottom Layer w10: v1(2755.91,1877.95) v1(3291.34,1877.95)
FSMC_A5: U1.15 U2.24 | length 2392.3
  Top Layer w10: U1.15@1987.57,1710.99 2157.58,1881 2670.18,1881 2700.79,1850.39 v1(2716.54,1850.39) ; v1(3543.31,2212.6) 3645.66,2314.96 3681.1,2314.96 3795.28,2429.13 3909.45,2429.13 3921.26,2440.94 U2.24@3921.26,2483.27
  Bottom Layer w10: v1(2716.54,1850.39) 3318.9,1850.39 3543.31,2074.8 v1(3543.31,2212.6) v1@3543.31,2220.47
FSMC_A6: LCD.2 U1.50 U2.23 | length 3044.3
  Top Layer w10: U1.50@2586.11,1599.64 2736.93,1448.82 2925.2,1448.82 2944.88,1468.5 3732.28,1468.5 3988.19,1724.41 v1(3988.19,2047.24) ; U2.23@3952.76,2483.27 3953.74,2484.25 v1(3988.19,2484.25) 3988.19,2531.5 4047.24,2590.55 4311.02,2590.55 4409.45,2688.98 4474.06,2688.98 LCD.2@4524.69,2739.61
  Bottom Layer w10: v1(3988.19,2047.24) v1(3988.19,2484.25)
FSMC_A7: U1.53 U2.22 | length 1810.7
  Top Layer w10: U1.53@2627.87,1641.4 2722.02,1547.24 2866.14,1547.24 2925.2,1488.19 3724.41,1488.19 3952.76,1716.54 U2.22@3952.76,2044.29
FSMC_A8: U1.54 U2.21 | length 1757
  Top Layer w10: U1.54@2641.79,1655.32 2733.86,1563.24 2873.76,1563.24 2929.13,1507.87 3716.54,1507.87 3921.26,1712.6 U2.21@3921.26,2044.29
FSMC_A9: U1.55 U2.20 | length 1703.4
  Top Layer w10: U1.55@2655.71,1669.24 2745.7,1579.24 2881.39,1579.24 2933.07,1527.56 3708.66,1527.56 3889.76,1708.66 U2.20@3889.76,2044.29
FSMC_A10: U1.56 U2.19 | length 1649.7
  Top Layer w10: U1.56@2669.63,1683.16 2757.54,1595.24 2889.01,1595.24 2937.01,1547.24 3700.79,1547.24 3858.27,1704.72 U2.19@3858.27,2044.29
FSMC_A11: U1.57 U2.18 | length 1596.1
  Top Layer w10: U1.57@2683.55,1697.08 2769.38,1611.24 2896.63,1611.24 2940.94,1566.93 3692.91,1566.93 3826.77,1700.79 U2.18@3826.77,2044.29
FSMC_A12: U1.87 U2.28 | length 1453.5
  Top Layer w10: U1.87@2697.47,2226.01 3187.99,2716.54 3657.48,2716.54 3795.28,2578.74 U2.28@3795.28,2483.27
FSMC_A13: U1.88 U2.27 | length 1507.2
  Top Layer w10: U1.88@2683.55,2239.93 3179.83,2736.22 3665.35,2736.22 3826.77,2574.8 U2.27@3826.77,2483.27
FSMC_A14: U1.89 U2.26 | length 1560.8
  Top Layer w10: U1.89@2669.63,2253.85 3171.68,2755.91 3673.23,2755.91 3858.27,2570.87 U2.26@3858.27,2483.27
FSMC_A15: U1.90 U2.25 | length 1614.5
  Top Layer w10: U1.90@2655.71,2267.77 3163.53,2775.59 3681.1,2775.59 3889.76,2566.93 U2.25@3889.76,2483.27
FSMC_A16: U1.80 U2.42 | length 731.1
  Top Layer w10: U1.80@2794.9,2128.58 3028.53,2362.2 3275.59,2362.2 3354.33,2440.94 U2.42@3354.33,2483.27
FSMC_A17: U1.81 U2.43 | length 707.8
  Top Layer w10: U1.81@2780.98,2142.5 3020.37,2381.89 3263.78,2381.89 3322.83,2440.94 U2.43@3322.83,2483.27
FSMC_A18: U1.82 U2.44 | length 684.5
  Top Layer w10: U1.82@2767.06,2156.42 3012.22,2401.57 3251.97,2401.57 3291.34,2440.94 U2.44@3291.34,2483.27
FSMC_D0: LCD.6 U1.85 U2.7 | length 2395.3
  Top Layer w10: v1(2657.48,2153.54) 2680.67,2153.54 U1.85@2725.3,2198.17 ; v1(3468.5,2125.98) 3480.32,2114.17 ; U2.7@3480.32,2044.29 3480.32,2114.17 ; LCD.6@4524.69,2539.61 4473.27,2488.19 4405.51,2488.19 4204.72,2287.4 3669.29,2287.4 3511.81,2129.92 3488.19,2129.92 3480.32,2122.05 3480.32,2114.17
  Bottom Layer w10: v1(2657.48,2153.54) 2645.67,2141.73 2645.67,2051.18 2661.42,2035.43 3417.32,2035.43 3468.5,2086.61 v1(3468.5,2125.98)
FSMC_D1: LCD.7 U1.86 U2.8 | length 2273.1
  Top Layer w10: v1(2618.11,2153.54) 2649.61,2185.04 2684.33,2185.04 U1.86@2711.38,2212.09 ; U2.8@3511.81,2044.29 v1(3511.81,2098.43) 3681.1,2267.72 4236.22,2267.72 4408.11,2439.61 LCD.7@4424.69,2439.61
  Bottom Layer w10: v1(2618.11,2153.54) 2622.05,2149.61 2622.05,2043.31 2649.61,2015.75 3429.13,2015.75 v1(3511.81,2098.43)
FSMC_D2: LCD.8 U1.114 U2.9 | length 3055.5
  Top Layer w10: U1.114@2210.29,2448.72 2446.41,2212.6 v1(2464.57,2212.6) ; v1(3452.76,1901.57) 3484.25,1933.07 3484.25,1956.69 3543.31,2015.75 U2.9@3543.31,2044.29 3543.31,2098.43 3692.91,2248.03 4263.78,2248.03 4405.51,2389.76 4474.84,2389.76 LCD.8@4524.69,2439.61
  Bottom Layer w10: v1(2464.57,2212.6) 2464.57,1953.71 2610.43,1807.84 3347.21,1807.84 3440.94,1901.57 v1(3452.76,1901.57)
FSMC_D3: LCD.9 U1.115 U2.10 | length 2931
  Top Layer w10: U1.115@2196.37,2434.8 2228.35,2402.82 2228.35,2389.76 v1(2437.01,2181.1) ; v1(3444.88,1862.2) 3456.69,1862.2 3503.94,1909.45 3503.94,1948.82 3574.8,2019.69 U2.10@3574.8,2044.29 3574.8,2102.36 3700.79,2228.35 4299.21,2228.35 4410.47,2339.61 LCD.9@4424.69,2339.61
  Bottom Layer w10: v1(2437.01,2181.1) 2437.01,1958.64 2603.81,1791.84 3362.71,1791.84 3433.07,1862.2 v1(3444.88,1862.2)
FSMC_D4: LCD.10 U1.58 U2.13 | length 2464.5
  Top Layer w10: U1.58@2697.47,1710.99 2781.22,1627.24 2904.25,1627.24 2933.07,1598.43 v1(3669.29,1598.43) ; v1(3669.29,1988.19) U2.13@3669.29,2044.29 3669.29,2082.68 3795.28,2208.66 4330.71,2208.66 4413.39,2291.34 4476.42,2291.34 LCD.10@4524.69,2339.61
  Bottom Layer w10: v1(3669.29,1598.43) v1(3669.29,1988.19)
FSMC_D5: LCD.11 U1.59 U2.14 | length 2276
  Top Layer w10: U1.59@2711.38,1724.91 2793.05,1643.24 2911.87,1643.24 2929.13,1625.98 v1(3700.79,1625.98) ; v1(3700.79,1968.5) U2.14@3700.79,2044.29 3700.79,2082.68 3807.09,2188.98 4374.06,2188.98 LCD.11@4424.69,2239.61
  Bottom Layer w10: v1(3700.79,1625.98) v1(3700.79,1968.5)
FSMC_D6: LCD.12 U1.60 U2.15 | length 2328.8
  Top Layer w10: U1.60@2725.3,1738.83 2804.89,1659.24 2919.5,1659.24 2925.2,1653.54 v1(3732.28,1653.54) ; v1(3732.28,1988.19) U2.15@3732.28,2044.29 3732.28,2082.68 3818.9,2169.29 4385.83,2169.29 4405.51,2188.98 4474.06,2188.98 LCD.12@4524.69,2239.61
  Bottom Layer w10: v1(3732.28,1653.54) v1(3732.28,1988.19)
FSMC_D7: LCD.13 U1.63 U2.16 | length 2020.1
  Top Layer w10: U1.63@2767.06,1780.59 2803.56,1744.09 3720.47,1744.09 v1(3763.78,1787.4) ; v1(3763.78,1968.5) U2.16@3763.78,2044.29 3763.78,2086.61 3826.77,2149.61 4414.69,2149.61 LCD.13@4424.69,2139.61
  Bottom Layer w10: v1(3763.78,1787.4) v1(3763.78,1968.5)
FSMC_D8: LCD.14 U1.64 U2.29 | length 2670.1
  Top Layer w10: U1.64@2780.98,1794.51 2815.4,1760.09 3012.06,1760.09 3248.03,1996.06 3248.03,2090.55 3283.46,2125.98 3417.32,2125.98 3633.86,2342.52 3677.17,2342.52 3763.78,2429.13 U2.29@3763.78,2483.27 v1(3763.78,2543.31) ; v1(4035.43,2007.87) 4322.83,2007.87 4405.51,2090.55 4475.63,2090.55 LCD.14@4524.69,2139.61
  Bottom Layer w10: v1(3763.78,2543.31) 3956.69,2350.39 3956.69,2027.56 3976.38,2007.87 v1(4035.43,2007.87)
FSMC_D9: LCD.15 U1.65 U2.30 | length 2601
  Top Layer w10: U1.65@2794.9,1808.43 2827.24,1776.09 3001.34,1776.09 3228.35,2003.1 3228.35,2098.43 3275.59,2145.67 3401.57,2145.67 3622.05,2366.14 3669.29,2366.14 3732.28,2429.13 U2.30@3732.28,2483.27 v1(3732.28,2574.8) ; v1(4035.43,1968.5) 4334.65,1968.5 4405.75,2039.61 LCD.15@4424.69,2039.61
  Bottom Layer w10: v1(3732.28,2574.8) 3732.28,2531.5 3937.01,2326.77 3937.01,2019.69 3988.19,1968.5 v1(4035.43,1968.5)
FSMC_D10: LCD.16 U1.66 U2.31 | length 2646.8
  Top Layer w10: U1.66@2808.82,1822.35 2839.08,1792.09 2989.5,1792.09 3208.66,2011.25 3208.66,2106.3 3267.72,2165.35 3385.83,2165.35 3610.24,2389.76 3661.42,2389.76 3700.79,2429.13 U2.31@3700.79,2483.27 v1(3700.79,2543.31) ; v1(4035.43,1929.13) 4346.46,1929.13 4405.51,1988.19 4473.27,1988.19 LCD.16@4524.69,2039.61
  Bottom Layer w10: v1(3700.79,2543.31) 3700.79,2523.62 3917.32,2307.09 3917.32,2011.81 4000,1929.13 v1(4035.43,1929.13)
FSMC_D11: LCD.17 U1.67 U2.32 | length 2577.1
  Top Layer w10: U1.67@2822.74,1836.27 2850.91,1808.09 2977.67,1808.09 3188.98,2019.41 3188.98,2114.17 3259.84,2185.04 3370.08,2185.04 3598.43,2413.39 3653.54,2413.39 3669.29,2429.13 U2.32@3669.29,2483.27 3669.29,2574.8 v1(3669.29,2570.87) ; v1(4035.43,1889.76) 4358.27,1889.76 4408.11,1939.61 LCD.17@4424.69,1939.61
  Bottom Layer w10: v1(3669.29,2570.87) 3669.29,2519.68 3893.7,2295.28 3893.7,2007.87 4011.81,1889.76 v1(4035.43,1889.76)
FSMC_D12: LCD.18 U1.68 U2.35 | length 2588.2
  Top Layer w10: U1.68@2836.66,1850.19 2862.75,1824.09 2965.83,1824.09 3169.29,2027.56 3169.29,2122.05 3251.97,2204.72 3354.33,2204.72 3574.8,2425.2 U2.35@3574.8,2483.27 v1(3574.8,2543.31) ; v1(4035.43,1850.39) 4366.14,1850.39 4405.51,1889.76 4474.84,1889.76 LCD.18@4524.69,1939.61
  Bottom Layer w10: v1(3574.8,2543.31) 3874.02,2244.09 3874.02,2000 4023.62,1850.39 v1(4035.43,1850.39)
FSMC_D13: LCD.19 U1.77 U2.36 | length 2362.8
  Top Layer w10: U1.77@2836.66,2086.82 2974.25,2224.41 3338.58,2224.41 3543.31,2429.13 U2.36@3543.31,2483.27 v1(3543.31,2574.8) ; v1(4035.43,1811.02) 4374.02,1811.02 4402.6,1839.61 LCD.19@4424.69,1839.61
  Bottom Layer w10: v1(3543.31,2574.8) 3543.31,2531.5 3854.33,2220.47 3854.33,1992.13 v1(4035.43,1811.02)
FSMC_D14: LCD.20 U1.78 U2.37 | length 2442.9
  Top Layer w10: U1.78@2822.74,2100.74 2966.1,2244.09 3322.83,2244.09 3511.81,2433.07 U2.37@3511.81,2483.27 v1(3511.81,2543.31) ; v1(4035.43,1771.65) 4385.83,1771.65 4405.51,1791.34 4476.42,1791.34 LCD.20@4524.69,1839.61
  Bottom Layer w10: v1(3511.81,2543.31) 3511.81,2523.62 3834.65,2200.79 3834.65,1972.44 v1(4035.43,1771.65)
FSMC_D15: LCD.21 U1.79 U2.38 | length 2409.9
  Top Layer w10: U1.79@2808.82,2114.66 2957.94,2263.78 3311.02,2263.78 3480.32,2433.07 U2.38@3480.32,2483.27 v1(3480.32,2574.8) ; v1(4035.43,1732.28) 4042.76,1739.61 LCD.21@4424.69,1739.61
  Bottom Layer w10: v1(3480.32,2574.8) 3480.32,2519.69 3814.96,2185.04 3814.96,1952.76 v1(4035.43,1732.28)
FSMC_NBL0: U1.141 U2.39 | length 1850.9
  Top Layer w10: U1.141@1834.46,2072.9 1875.86,2031.5 1964.57,2031.5 2031.5,2098.43 2724.41,2098.43 v1(2736.22,2086.61) ; v1(3015.75,2291.34) 3015.75,2283.46 3295.28,2283.46 3448.82,2437.01 U2.39@3448.82,2483.27
  Bottom Layer w10: v1(2736.22,2086.61) 2795.28,2086.61 3000,2291.34
FSMC_NBL1: U1.142 U2.40 | length 1859.2
  Top Layer w10: U1.142@1820.54,2058.98 1871.65,2007.87 1968.5,2007.87 2039.37,2078.74 2657.48,2078.74 2669.29,2066.93 v1(2677.17,2066.93) ; v1(3043.31,2318.9) 3055.12,2307.09 3283.46,2307.09 3417.32,2440.94 U2.40@3417.32,2483.27
  Bottom Layer w10: v1(2677.17,2066.93) 2724.41,2114.17 2795.28,2114.17 3000,2318.9 v1(3043.31,2318.9)
FSMC_NE3: U1.125 U2.6 | length 1852.5
  Top Layer w10: U1.125@2057.17,2295.61 2199.24,2153.54 2346.46,2153.54 2381.89,2118.11 2484.25,2118.11 v1(2492.13,2125.98) ; U2.6@3448.82,2044.29 3448.82,1948.82 v1(3452.76,1944.88)
  Bottom Layer w10: v1(2492.13,2125.98) 2492.13,1948.82 2617.1,1823.84 3331.72,1823.84 v1(3452.76,1944.88)
FSMC_NE4: LCD.1 U1.127 | length 3675.3
  Top Layer w10: U1.127@2029.33,2267.77 2171.12,2125.98 v1(2334.65,2125.98) ; v1(3393.7,1716.54) 3736.22,1716.54 v1(3763.78,1744.09)
  Bottom Layer w10: v1(2334.65,2125.98) 2334.65,2015.75 2590.55,1759.84 3350.39,1759.84 v1(3393.7,1716.54) ; v1(3763.78,1744.09) 3889.76,1618.11 4035.43,1618.11 4090.55,1673.23 4090.55,2456.69 4373.46,2739.61 LCD.1@4424.69,2739.61
FSMC_NOE: LCD.4 U1.118 U2.41 | length 2827.6
  Top Layer w10: U1.118@2154.61,2393.05 2185.45,2362.2 2216.54,2362.2 2425.2,2153.54 2570.87,2153.54 2598.43,2125.98 v1(2696.85,2125.98) ; v1(3082.67,2334.64) 3263.78,2334.64 3271.65,2326.77 3385.83,2440.94 U2.41@3385.83,2483.27 3385.83,2519.69 v1@3435.04,2568.9 ; v1(4062.99,2519.68) 4094.49,2551.18 4370.08,2551.18 4409.45,2590.55 4475.63,2590.55 LCD.4@4524.69,2639.61
  Bottom Layer w10: v1(2696.85,2125.98) 2704.72,2133.86 2787.4,2133.86 3003.94,2350.39 3066.92,2350.39 v1(3082.67,2334.64) ; v1@3435.04,2568.9 3468.5,2602.36 3751.97,2602.36 3807.09,2547.24 4035.43,2547.24 v1(4062.99,2519.68)
  other v1: 3440.94,2574.8